# Altium PCB USBasp_下载线.PCBDOC
Units mm, origin at the board's own origin, x right, y up, seen from the top; angles counter-clockwise.
Board outline 152.4 x 101.6 mm, 2 copper layers (Top Layer, Bottom Layer); 15 components, 22 nets, 72 pads, 19 vias.
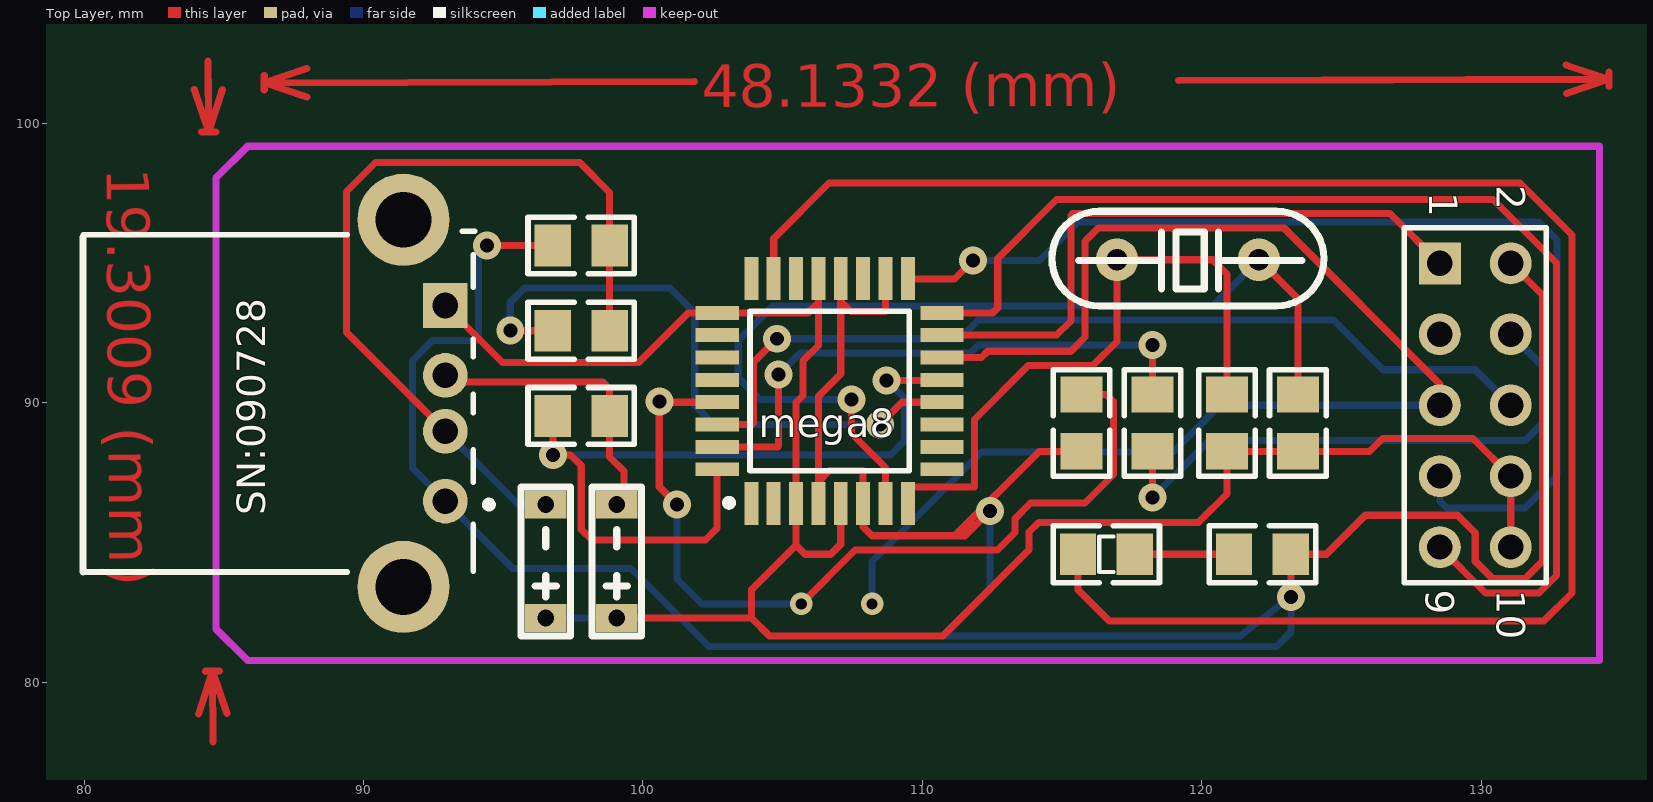
[diagram p0: Top Layer view]
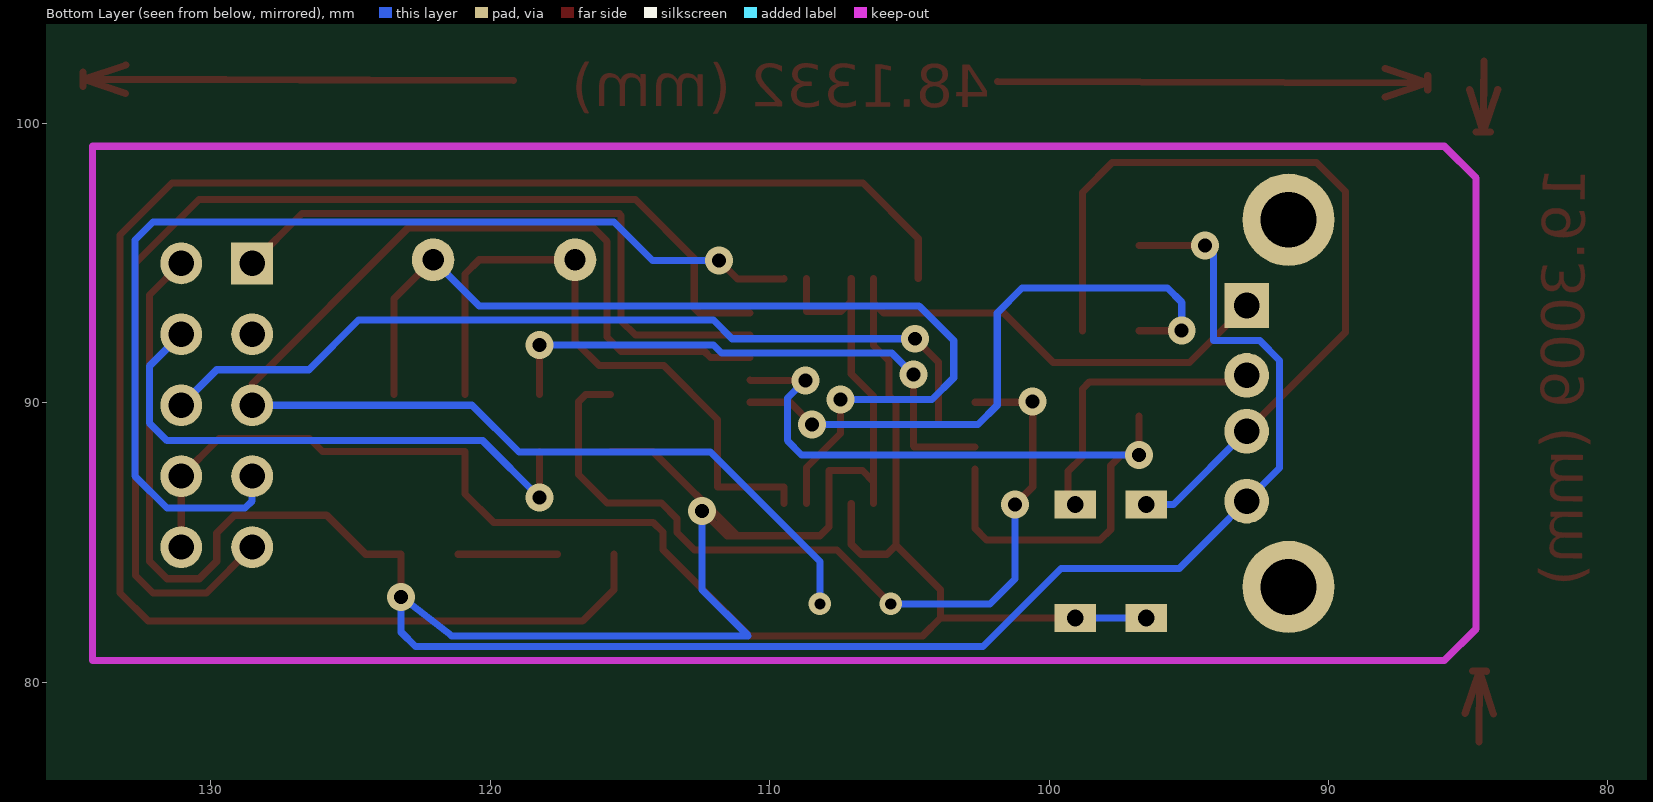
[diagram p1: Bottom Layer view, seen from below]

## Layer stack, top to bottom
Top Layer: signal copper 0.0356
Dielectric: dielectric 0.32, FR-4, Dk 4.8
Bottom Layer: signal copper 0.0356

## Board outline
25.4,25.4 177.8,25.4 177.8,127 25.4,127

## Design rules (kind name [scope] priority, off if disabled: settings)
Clearance [All] p1: gap=0.254
ComponentClearance [All] p1: gap=0.254 collisioncheckmode=3 verticalgap=0.254
PolygonConnect [All] p1: connectstyle=Relief reliefconductorwidth=0.254 reliefentries=4 polygonreliefangle="90 Angle"
RoutingTopology [All] p1: topology=Vertical
RoutingVias [All] p1: holewidth=0.5 width=1 viastyle="Through Hole" minholewidth=0.5 minwidth=1 maxholewidth=0.5 maxwidth=1
SolderMaskExpansion [All] p1: expansion=0.102
TestPointUsage [All] p1: valid=0 allowmultiple=FALSE
Testpoint [All] p1: side=15 testpointundercomponent=TRUE minsize=1.016 maxsize=2.54 preferedsize=1.524 minholesize=0 maxholesize=1.016 preferedholesize=0.813 testpointgrid=0.025 style=1023 order=0123456789
Width Width_3 [All] p1: maxlimit=0.254 minlimit=0.254 preferedwidth=0.254
Width Width_2 [InNet('VCC')] p2: maxlimit=0.454 minlimit=0.454 preferedwidth=0.454
Width Width_1 [InNet('GND')] p3: maxlimit=0.454 minlimit=0.454 preferedwidth=0.454
16 further rules are at their usual default settings.

## Components (designator, comment, footprint, x,y, rotation, side; value= is the part's Value field where it differs from the comment)
C4 "" TP-0805-R 124.714,91.821 r90 top
C5 "" TP-0805-R 122.174,91.821 r90 top
D1 "Diode 11DQ03" TPDR 99.06,86.868 r90 top
D2 "Diode 11DQ03" TPDR 96.52,86.868 r90 top
ISP "" HDR2X5 128.524,94.996 r270 top
JP1 "4 HEADER" USB-5V_M 90.424,86.36 r180 top
LED2 "" TP-0805-D 114.046,85.852 r180 top
mega8 "贴片" QFP7x7-G32/N 106.68,90.424 r90 top
R1 "" TP-0805-R 95.25,93.853 r180 top
R2 "" TP-0805-R 100.33,88.265 r0 top
R3 "" TP-0805-R 95.25,96.901 r180 top
R4 "" TP-0805-R 124.714,83.312 r0 top
R6 "" TP-0805-R 114.427,86.741 r270 top
R7 "" TP-0805-R 119.507,91.821 r90 top
Y1 "XTAL" JZ_ZC 116.967,95.123 r180 top

## Footprints (in the part's own frame and the unit in brackets; to place one, negate y for a bottom-side part, rotate by r counter-clockwise, add the part's x,y. Pads: shape width x height; smd on the part's side, far side on the other; paste and mask are expansions set on the pad)
HDR2X5 [mm] "Connector; Header; 5x2 Position"
  rect 1.5x1.5 hole 0.9: 1(0,0)
  round 1.5 hole 0.9: 2(0,2.54) 3(2.54,0) 4(2.54,2.54) 5(5.08,0) 6(5.08,2.54) 7(7.62,0) 8(7.62,2.54) 9(10.16,0) 10(10.16,2.54)
  silkscreen extent -1.27,-1.27 11.43,3.81
JZ_ZC [mil] "晶振"
  round 60 hole 30: 1(-200,0) 2(0,0)
  silkscreen extent -292,-68 92,65
QFP7x7-G32/N [mm] "贴片mega8"
  rect 1.55x0.5 smd: 1(-4.025,2.8) 2(-4.025,2) 3(-4.025,1.2) 4(-4.025,0.4) 5(-4.025,-0.4) 6(-4.025,-1.2) 7(-4.025,-2) 8(-4.025,-2.8) 17(4.025,-2.8) 18(4.025,-2) 19(4.025,-1.2) 20(4.025,-0.4) 21(4.025,0.4) 22(4.025,1.2) 23(4.025,2) 24(4.025,2.8)
  rect 0.5x1.55 smd: 9(-2.8,-4.025) 10(-2,-4.025) 11(-1.2,-4.025) 12(-0.4,-4.025) 13(0.4,-4.025) 14(1.2,-4.025) 15(2,-4.025) 16(2.8,-4.025) 25(2.8,4.025) 26(2,4.025) 27(1.2,4.025) 28(0.4,4.025) 29(-0.4,4.025) 30(-1.2,4.025) 31(-2,4.025) 32(-2.8,4.025)
  silkscreen extent -4.12,-2.85 2.85,3.72
TP-0805-D [mm] "贴片二极管"
  rect 1.3x1.5 smd: 1(-3.556,1.27) 2(-1.524,1.27)
  silkscreen extent -4.44,0.25 -0.64,2.29
TP-0805-R [mm] "贴片0805"
  rect 1.3x1.5 smd: 1(-3.556,1.27) 2(-1.524,1.27)
  silkscreen extent -4.44,0.25 -0.64,2.29
TPDR [mm] "贴片电容"
  rect 1x1.5 hole 0.6: 1(-4.572,0) 2(-0.508,0)
  silkscreen extent -5.21,-0.89 0.13,0.89
USB-5V_M [mm] "USB接口_母"
  round 1.6 hole 0.92: 1(-2.503,-0.123) 2(-2.503,-2.624) 3(-2.503,-4.624)
  rect 1.6x1.6 hole 0.92: 4(-2.503,-7.123)
  round 3.3 hole 2: 5(-1.002,-10.193) 6(-1.002,2.947)
  silkscreen extent -4.19,-9.78 10.47,2.41

## Part data
C4 C5: library part CAPSMD, "Capacitor SMD1206"
D1 D2: "Schottky Rectifier"
ISP: library part MLW10A, "Header, 5-Pin, Dual row, Right Angle"
JP1: "4 Pin Header"
LED2: library part "LED Zöld", "Zöld Led 3mm"
mega8: library part ATmega8-A, "8 位微处理器/32引脚"
R1 R2 R3 R4 R6 R7: library part RES, "Resistor SMD1206, 1% fémréteg"
Y1: "Crystal Oscillator"

## Via types
v1: diameter 1, hole 0.5, Top Layer to Bottom Layer, 15 vias
v2: diameter 0.8, hole 0.4, Top Layer to Bottom Layer, 4 vias

## Nets (pads, with @x,y where several pads share a name; then routed paths per layer and width w, separated by ;. In a path a pad name is that pad's centre, name@x,y a point inside that pad or via, vN(x,y) a via of type N, cw(c..) or ccw(c..) an arc to the next point about the centre after c; other vN are vias at no path point)
GND: C4.1 C5.1 D1.1 D2.1 ISP.8 ISP.10 JP1.4 mega8.3 mega8.5 mega8.21 mega8.25 | length 73.7
  Top Layer w0.254: JP1.4 94.97,91.44 99.847,91.44 101.631,93.224 mega8.25 105.918,93.224 106.28,93.586 ; D1.1 103.886,82.296 ; mega8.21 106.28,92.057 105.732,91.509 105.732,90.27 105.48,90.018 105.48,84.906 ; mega8.5 107.08,84.938 106.724,84.582 105.804,84.582 105.48,84.906 ; ISP.10 ISP.8 129.718,88.722 126.467,88.722 126.009,88.265 C4.1 C5.1 120.904,86.741 119.888,85.725 114.171,85.725 113.823,85.376 113.823,84.74 110.744,81.661 104.521,81.661 103.886,82.296 ; 103.886,82.296 103.886,83.312 105.48,84.906
  Bottom Layer w0.254: D2.1 D1.1
MISO: ISP.9 mega8.16 | length 42
  Top Layer w0.254: mega8.16 112.522,93.224 112.699,93.401 112.699,95.173 114.808,97.282 130.429,97.282 132.703,95.008 132.703,83.82 132.08,83.197 130.163,83.197 ISP.9
MOSI: ISP.1 mega8.15 | length 22.6
  Top Layer w0.254: mega8.15 114.808,92.424 115.316,92.932 115.316,96.71 115.38,96.774 126.746,96.774 ISP.1
NetD1_2: D1.2 JP1.3 R2.2 | length 10.8
  Top Layer w0.254: JP1.3 92.927,90.754 98.552,90.754 98.806,90.5 R2.2 98.806,88.062 99.316,87.552 99.316,86.36 D1.2
NetD2_2: D2.2 JP1.2 R1.1 R3.1 | length 30
  Top Layer w0.254: JP1.2 89.383,92.527 89.383,97.561 90.424,98.603 97.739,98.603 98.806,97.536 R3.1 R1.1
  Bottom Layer w0.254: JP1.2 95.55,86.36 D2.2
NetISP_2: 
NetISP_4: ISP.4 R7.1 | length 20.4
  Top Layer w0.254: v1(118.237,86.614) R7.1
  Bottom Layer w0.254: v1(118.237,86.614) 120.269,88.646 131.572,88.646 132.207,89.281 132.207,91.313 ISP.4
NetJ1_1: 
NetJ3_2: mega8.29 R6.1 | length 30.7
  Top Layer w0.254: v1(100.584,90.043) 100.584,86.995 v1(101.219,86.36) ; v1@100.603,90.024 mega8.29 ; v2(105.664,82.804) 107.594,84.734 112.687,84.734 113.315,85.362 113.315,85.852 113.877,86.414 115.824,86.414 116.84,87.43 116.84,90.043 116.586,90.297 R6.1
  Bottom Layer w0.254: v1(101.219,86.36) 101.219,83.693 102.108,82.804 v2(105.664,82.804)
  other v2: 105.664,82.804
NetLED1_1: 
NetLED1_2: mega8.24
NetLED2_1: LED2.1 R4.1 | length 3.6
  Top Layer w0.254: LED2.1 R4.1
NetLED2_2: LED2.2 mega8.23 | length 64.2
  Top Layer w0.254: mega8.23 104.68,95.885 106.661,97.866 131.39,97.866 133.253,96.003 133.253,83.197 132.244,82.188 116.694,82.188 115.57,83.312 LED2.2
Netmega8_12: mega8.12 R1.2 | length 22.5
  Top Layer w0.254: v1(95.25,92.583) R1.2 ; v1(108.483,89.23) 109.277,90.024 mega8.12
  Bottom Layer w0.254: v1(95.25,92.583) 95.25,93.599 95.758,94.107 100.965,94.107 101.854,93.218 101.854,89.916 102.54,89.23 v1(108.483,89.23)
PB1: mega8.13 mega8.32 R2.1 | length 29.4
  Top Layer w0.254: R2.1 v1(96.774,88.138) 97.409,88.138 97.79,87.757 97.79,85.471 98.171,85.09 102.235,85.09 102.655,85.51 mega8.32 ; v1(108.712,90.805) 110.686,90.805 mega8.13
  Bottom Layer w0.254: v1(96.774,88.138) 108.856,88.138 109.364,88.646 109.364,90.17 108.729,90.805 v1(108.712,90.805) v1@108.732,90.802
PB6: C4.2 mega8.7 Y1.1 | length 35.2
  Top Layer w0.254: v1(107.467,90.119) 107.467,88.9 108.68,87.687 mega8.7 ; Y1.1 123.444,93.726 C4.2
  Bottom Layer w0.254: v1(107.467,90.119) 104.191,90.119 103.411,90.899 103.411,92.235 104.648,93.472 120.396,93.472 Y1.1
PB7: C5.2 mega8.8 Y1.2 | length 23
  Top Layer w0.254: mega8.8 109.48,86.993 111.862,86.993 111.862,89.408 113.792,91.338 116.103,91.338 116.967,92.202 Y1.2 120.396,95.123 120.904,94.615 C5.2
PD0: ISP.6 mega8.30 | length 32.5
  Top Layer w0.254: mega8.30 103.905,89.224 103.961,89.28 103.961,91.457 v1(104.8,92.296)
  Bottom Layer w0.254: v1(104.8,92.296) 111.346,92.296 112.014,92.964 124.714,92.964 126.492,91.186 129.794,91.186 ISP.6
PD1: mega8.31 R7.2 | length 20.4
  Top Layer w0.254: mega8.31 104.826,88.424 104.851,88.449 v1(104.851,91.008) ; R7.2 v1(118.237,92.075)
  Bottom Layer w0.254: v1(104.851,91.008) 105.631,91.788 111.727,91.788 112.014,92.075 v1(118.237,92.075)
RESET: ISP.5 mega8.14 | length 49
  Top Layer w0.254: mega8.14 112.122,91.624 112.344,91.846 115.316,91.846 115.824,92.354 115.824,95.783 116.307,96.266 122.936,96.266 128.524,90.678 ISP.5
  Bottom Layer w0.254: v2(108.204,82.804) 108.204,84.322 112.121,88.24 118.974,88.24 120.65,89.916 ISP.5
  other v2: 108.204,82.804
SCK: ISP.7 mega8.17 | length 38.5
  Top Layer w0.254: mega8.17 109.48,94.437 111.15,94.437 v1(111.811,95.098)
  Bottom Layer w0.254: v1(111.811,95.098) 114.198,95.098 115.57,96.469 132.08,96.469 132.715,95.834 132.715,87.376 131.572,86.233 128.778,86.233 128.524,86.487 ISP.7
VCC: ISP.2 JP1.1 mega8.4 mega8.6 mega8.18 mega8.20 R3.2 R4.2 R6.2 | length 116
  Top Layer w0.254: v1(94.41,95.631) R3.2 ; mega8.4 106.28,87.179 ; mega8.20 107.08,93.631 ; mega8.18 108.68,93.269 107.442,93.269 107.08,93.631 ; 111.161,85.242 114.184,88.265 R6.2 ; v1(112.42,86.131) 111.531,85.242 108.204,85.242 107.88,85.566 mega8.6 107.88,87.579 106.68,87.579 106.28,87.179 ; v1(123.19,83.058) R4.2 124.46,84.582 125.857,85.979 129.159,85.979 129.794,85.344 129.794,84.328 130.417,83.705 131.572,83.705 132.195,84.328 132.195,93.865 ISP.2 ; 106.28,87.179 106.28,90.236 107.08,91.036 107.08,93.631
  Bottom Layer w0.254: JP1.1 JP1.1@92.968,86.483 ; v1(94.41,95.631) 94.108,95.329 94.108,92.227 92.456,92.227 91.745,91.516 91.745,87.665 95.336,84.074 99.568,84.074 102.362,81.28 122.682,81.28 123.19,81.788 v1(123.19,83.058) 121.387,81.661 110.769,81.661 112.42,83.312 v1(112.42,86.131)
pads on no net: ISP.3 JP1.5 JP1.6 mega8.1 mega8.2 mega8.9 mega8.10 mega8.11 mega8.19 mega8.22 mega8.26 mega8.27 mega8.28
copper on no net: | length 50.8
  Top Layer w0.254: 83.936,101.215 84.455,99.695 ; 84.096,78.867 84.593,80.395 ; 84.201,99.693 84.709,99.697 ; 84.339,80.393 84.847,80.396 ; 84.437,102.235 84.455,99.695 ; 84.611,77.855 84.593,80.395 ; 84.952,101.223 84.455,99.695 ; 85.112,78.874 84.593,80.395 ; 86.443,101.711 86.444,101.203 ; 87.966,101.969 86.444,101.457 ; 87.969,100.953 86.444,101.457 ; 101.852,101.497 86.444,101.457 ; 119.169,101.543 134.577,101.584 ; 133.051,102.088 134.577,101.584 ; 133.054,101.072 134.577,101.584 ; 134.576,101.838 134.577,101.33

## Keep-outs
Keep-Out Layer:
  lines w0.254: 84.709,81.915 85.852,80.772 134.239,80.772 134.239,99.187 85.852,99.187 84.709,98.044 84.709,81.915

## Other copper
Top Layer:
  text "48.1332 (mm)" at 102.108,100.584 h1.52 r0.15
  text "19.3009 (mm)" at 80.807,98.423 h1.52 r270.41

## Silkscreen, mask and mechanical layers (free items; w line width, h text height)
Top Overlay:
  text "SN:090728" at 86.487,85.979 h1.02 r90
Mechanical 1:
  lines w0.254: 84.455,81.788 84.455,82.169 84.455,98.171 84.582,98.298 85.725,99.441 134.493,99.441 134.493,98.806 134.493,81.026 134.493,80.518 85.725,80.518 84.455,81.788

## Text inside footprints (layer, text, board x,y; h text height)
ISP: Top Overlay "2" at 130.556,97.79 h1.02 r270; Top Overlay "1" at 128.143,97.536 h1.02 r270; Top Overlay "9" at 128.016,83.312 h1.02 r270; Top Overlay "10" at 130.556,83.312 h1.02 r270